# EAGLE board Board_Light Project_updated (EAGLE 9.2.2)
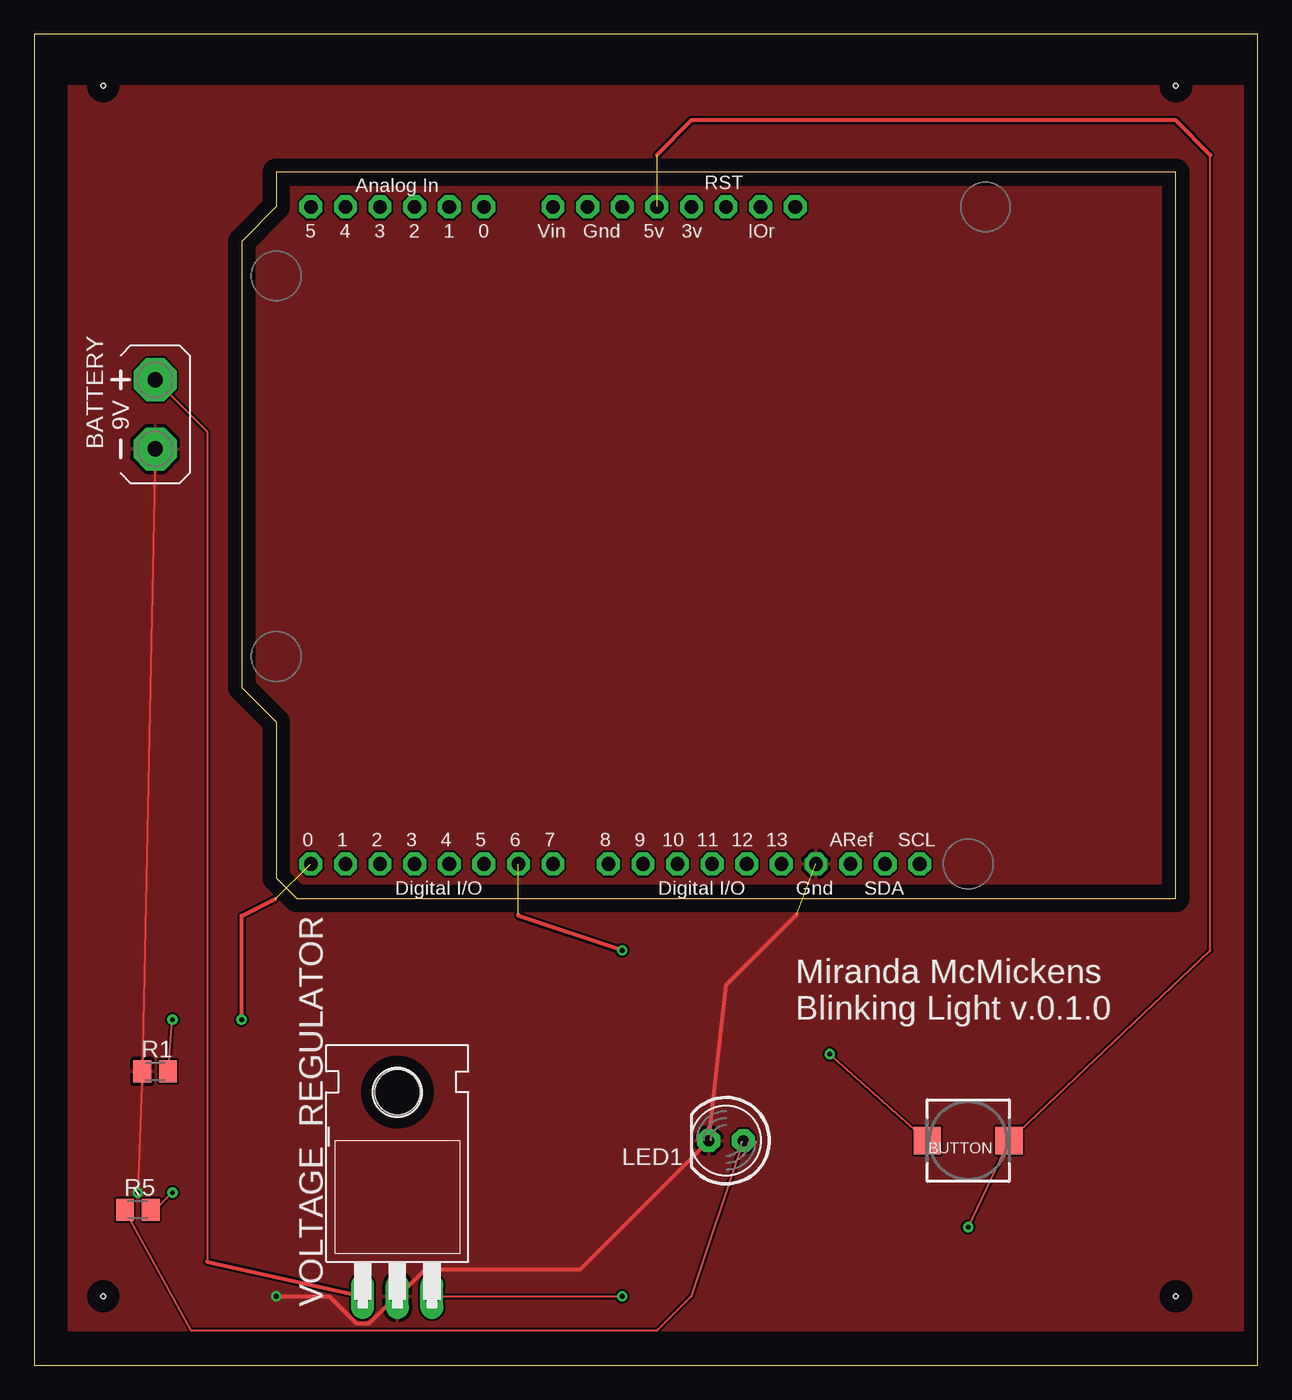
[diagram p0: board, top side]
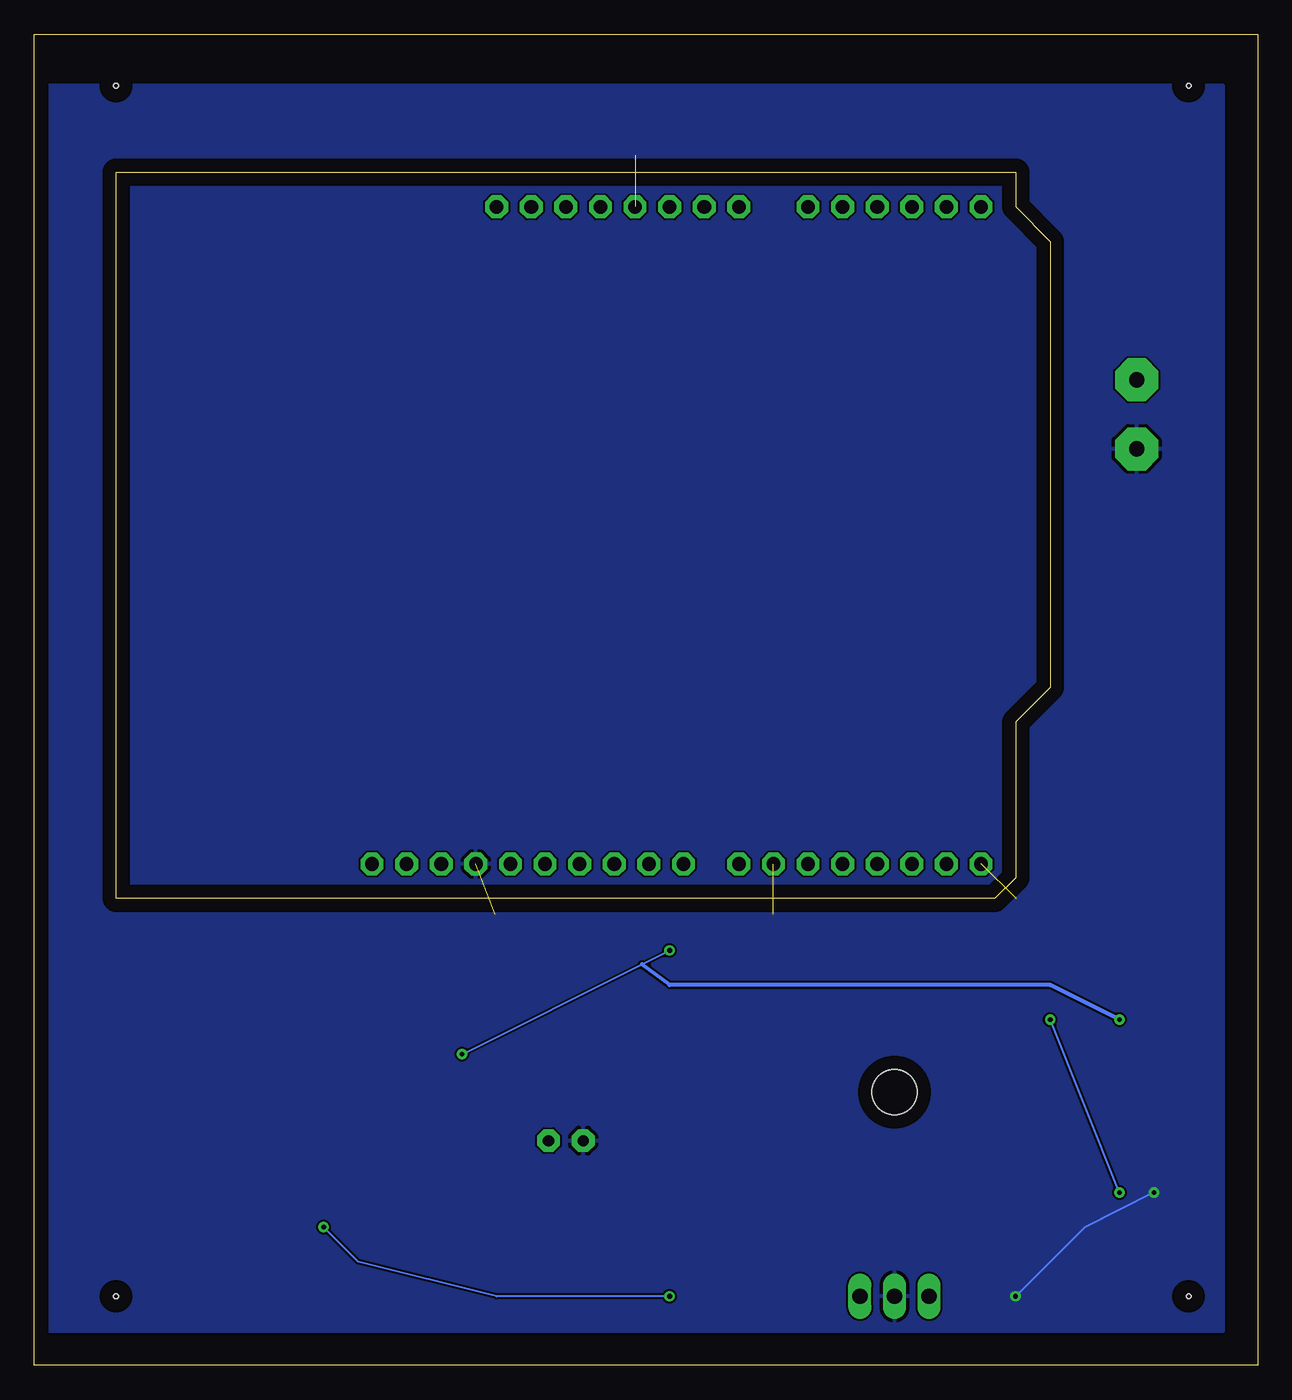
[diagram p1: board, bottom side, seen from below]

Size 89.84 x 97.78 mm. Coordinates in mm from the lower left corner, seen from the top.
Outline: 0,0 89.84,0 89.84,97.78 0,97.78 0,0
Copper layers (1*16): Top 0.035mm / dielectric 1.5mm / Bottom 0.035mm
Design rules "default": minimum track width 6mil, minimum drill 0.35mm, track to track 6mil, track to pad 6mil, pad to pad 6mil, via to via 6mil, smd to smd 6mil, copper to edge 40mil, drill to drill 6mil, minimum pad ring 10mil, minimum via ring 8mil, stop-mask expansion 4mil, vias tented up to drill 0mil, thermal gap 10mil
Holes 0.35 mm at 83.82,93.98 5.08,93.98 5.08,5.08 83.82,5.08

## Footprints (pad centres in the part's own frame; a part is rotated, then mirrored left to right if it is on the bottom)
ARDUINOR3 = drill 1 pad 1.676 octagon: 3V 35.56,2.54; 5V 38.1,2.54; A0 50.8,2.54; A1 53.34,2.54; A2 55.88,2.54; A3 58.42,2.54; A4 60.96,2.54; A5 63.5,2.54; AREF 23.876,50.8; D0 63.5,50.8; D1 60.96,50.8; D2 58.42,50.8; D3 55.88,50.8; D4 53.34,50.8; D5 50.8,50.8; D6 48.26,50.8; D7 45.72,50.8; D8 41.656,50.8; D9 39.116,50.8; D10 36.576,50.8; D11 34.036,50.8; D12 31.496,50.8; D13 28.956,50.8; GND 26.416,50.8; GND1 43.18,2.54; GND2 40.64,2.54; IOREF 30.48,2.54; RESERVED 27.94,2.54; RESET 33.02,2.54; SCL 18.796,50.8; SDA 21.336,50.8; VIN 45.72,2.54
AB9V = drill 1.118 pad 3.15 octagon: + 0,2.54; - 0,-2.54
PUSHBUTTON_SMD_SJ = smd 2 x 2: P$1 3,0; P$2 -3,0
LED5MM = drill 0.813 pad 1.676 octagon: A -1.27,0; K 1.27,0
M0805 = smd 1.3 x 1.6: 1 -0.95,0; 2 0.95,0
TO220H = drill 1.118 long: 1 -2.54,-10.16; 2 0,-10.16; 3 2.54,-10.16 | hole 3.302: 0,4.826

## Placement (x,y rotation side)
ARDUINO  ARDUINOR3-DIMENSION  [ARDUINOR3]  83.82,87.63 180 top
BATTERY  AB9V  [AB9V]  8.89,69.85 0 top
BUTTON  [PUSHBUTTON_SMD_SJ]  68.58,16.51 180 top
LED1  [LED5MM]  50.8,16.51 180 top
R1  100K  [M0805]  8.89,21.59 0 top
R5  100K  [M0805]  7.62,11.43 0 top
VOLTAGE_REGULATOR  7805T  [TO220H]  26.67,15.24 0 top

## Library data of the parts
ARDUINO BUTTON LED1 R1 R5 VOLTAGE_REGULATOR = adafruit
BATTERY = battery

## Nets
3V: ARDUINO.3V
+5V: ARDUINO.5V BUTTON.P$2 VOLTAGE_REGULATOR.3
GND: ARDUINO.GND BATTERY.- LED1.K R1.1 VOLTAGE_REGULATOR.2
GND1: ARDUINO.GND1
GND2: ARDUINO.GND2
N$1: BATTERY.+ VOLTAGE_REGULATOR.1
N$5: ARDUINO.D6 BUTTON.P$1 R1.2
N$8: ARDUINO.D0 R5.2
N$9: LED1.A R5.1
VIN: ARDUINO.VIN

## Tracks (layer width: path | path; a pad name or v marks a point on that pad's centre or on a via)
+5V  (via drill 0.35)  (1 unrouted)
  Top 0.152: VOLTAGE_REGULATOR.3 v43.18,5.08 | v68.58,10.16 BUTTON.P$2 86.36,30.48 86.36,88.9
  Top 0.305: 86.36,88.9 83.82,91.44 48.26,91.44 45.72,88.9
  Bottom 0.152: v43.18,5.08 55.88,5.08 66.04,7.62 v68.58,10.16
GND  (via drill 0.35)  (1 unrouted)
  Top 0.152: BATTERY.- R1.1 v7.62,12.7 | VOLTAGE_REGULATOR.2 26.86,5.08
  Top 0.305: 55.98,33.12 50.8,27.94 LED1.K 40.08,7.06 28.74,7.06 26.75,5.08 VOLTAGE_REGULATOR.2 26.59,5.08 24.6,3.1 23.66,3.1 21.68,5.08 v17.78,5.08
  Bottom 0.152: v7.62,12.7 12.7,10.16 v17.78,5.08
  pour Top: 2.54,93.98 88.9,93.98 88.9,2.54 2.54,2.54
  pour Bottom: 2.54,93.98 88.9,93.98 88.9,2.54 2.54,2.54
N$1
  Top 0.152: BATTERY.+ 12.7,68.58 12.7,7.62
  Top 0.305: 12.7,7.62 VOLTAGE_REGULATOR.1
N$5  (via drill 0.35)  (1 unrouted)
  Top 0.152: BUTTON.P$1 v58.42,22.86 | R1.2 v10.16,25.4
  Top 0.305: v43.18,30.48 35.56,33.02 35.56,33.12
  Bottom 0.152: v58.42,22.86 45.21,29.46 v43.18,30.48
  Bottom 0.305: v10.16,25.4 15.24,27.94 43.18,27.94 45.21,29.46
N$8  (via drill 0.35)  (1 unrouted)
  Top 0.152: v10.16,12.7 8.8,11.34 R5.2
  Top 0.305: v15.24,25.4 15.24,33.02 17.69,34.25
  Bottom 0.152: v10.16,12.7 v15.24,25.4
N$9
  Top 0.152: LED1.A 48.26,5.08 45.72,2.54 11.56,2.54 R5.1

## Text on the board
tSilk: Miranda McMickens / Blinking Light v.0.1.0